# Altium PCB ShifterMatic_2Layer.PcbDoc
Units mil, origin at the board's own origin, x right, y up, seen from the top; angles counter-clockwise.
Board outline 1350 x 1300 mil, 2 copper layers (Top (L1), Bottom (L4)), stack 60.8 mil thick; 33 components, 20 nets, 92 pads, 19 vias.
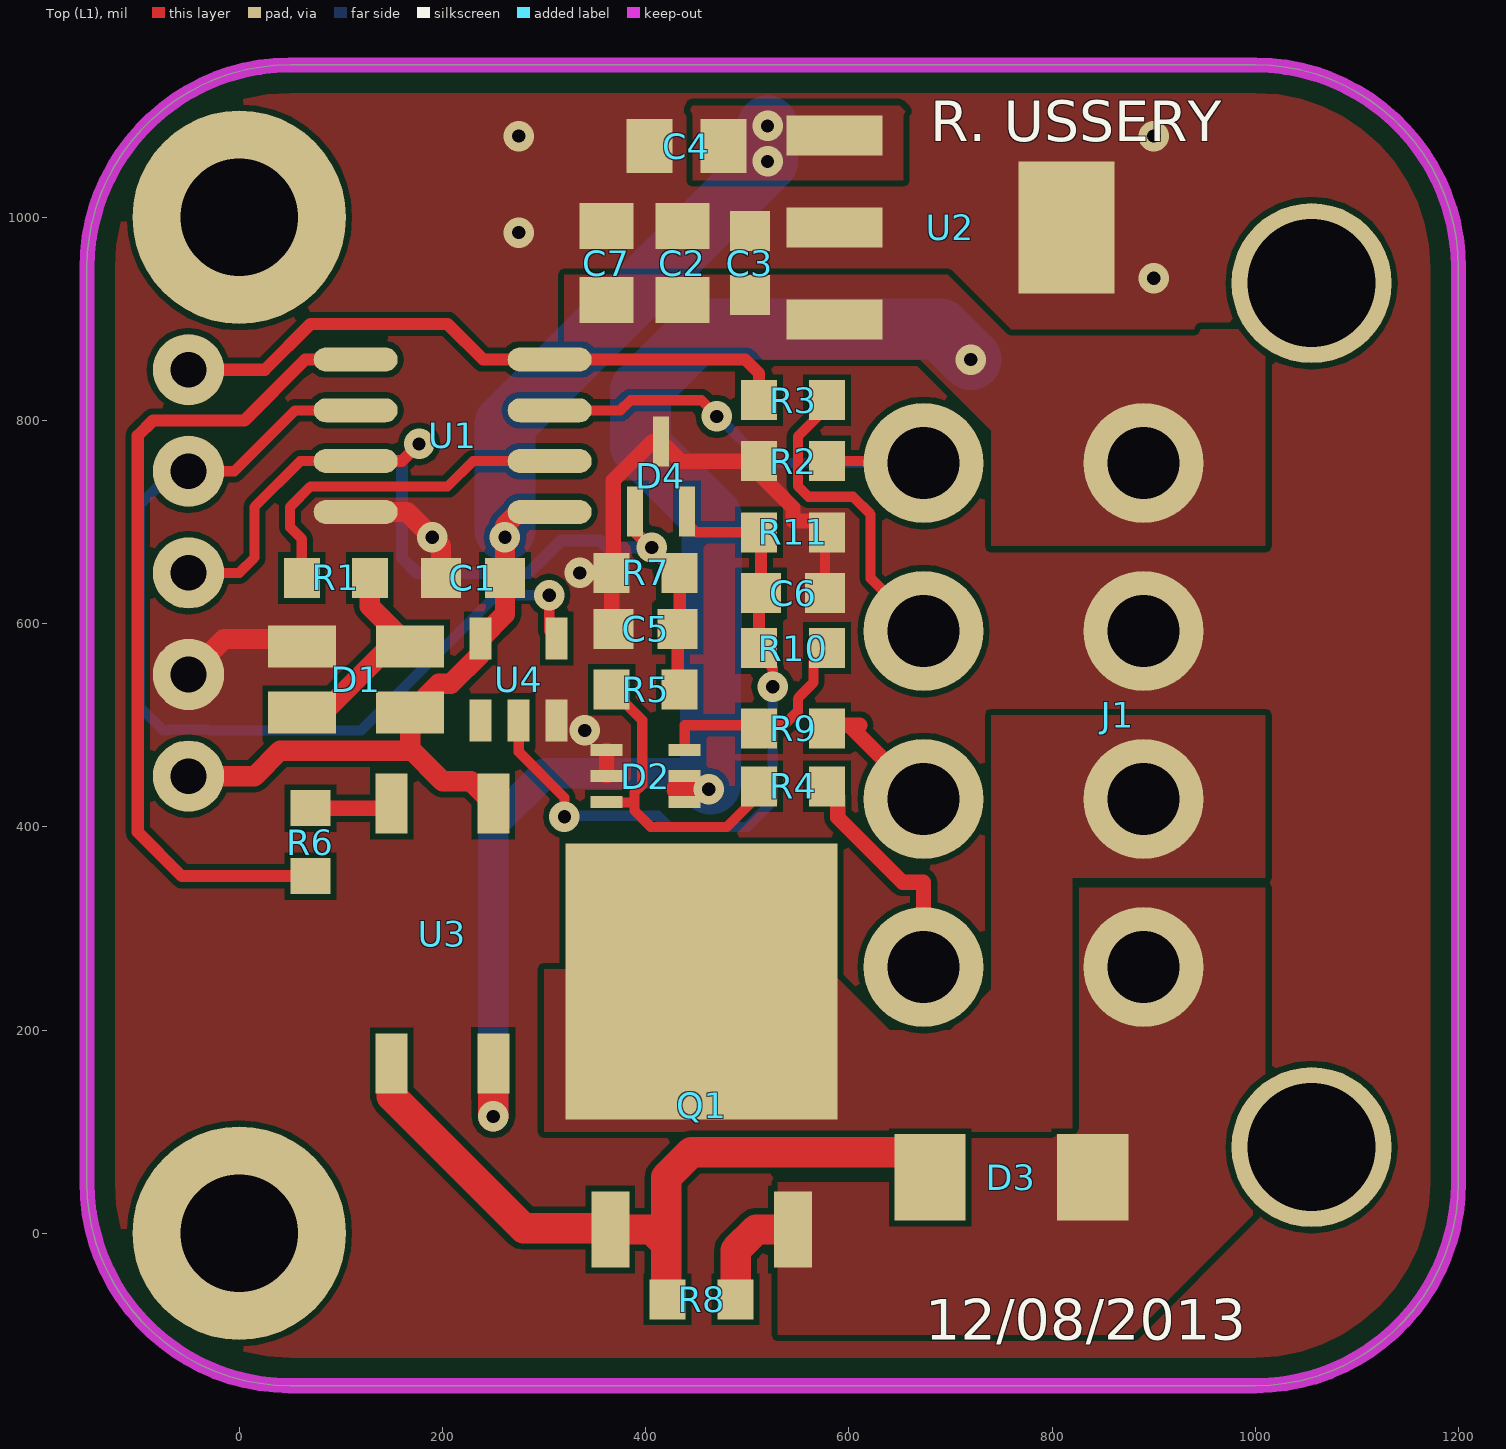
[diagram p0: Top (L1) view]
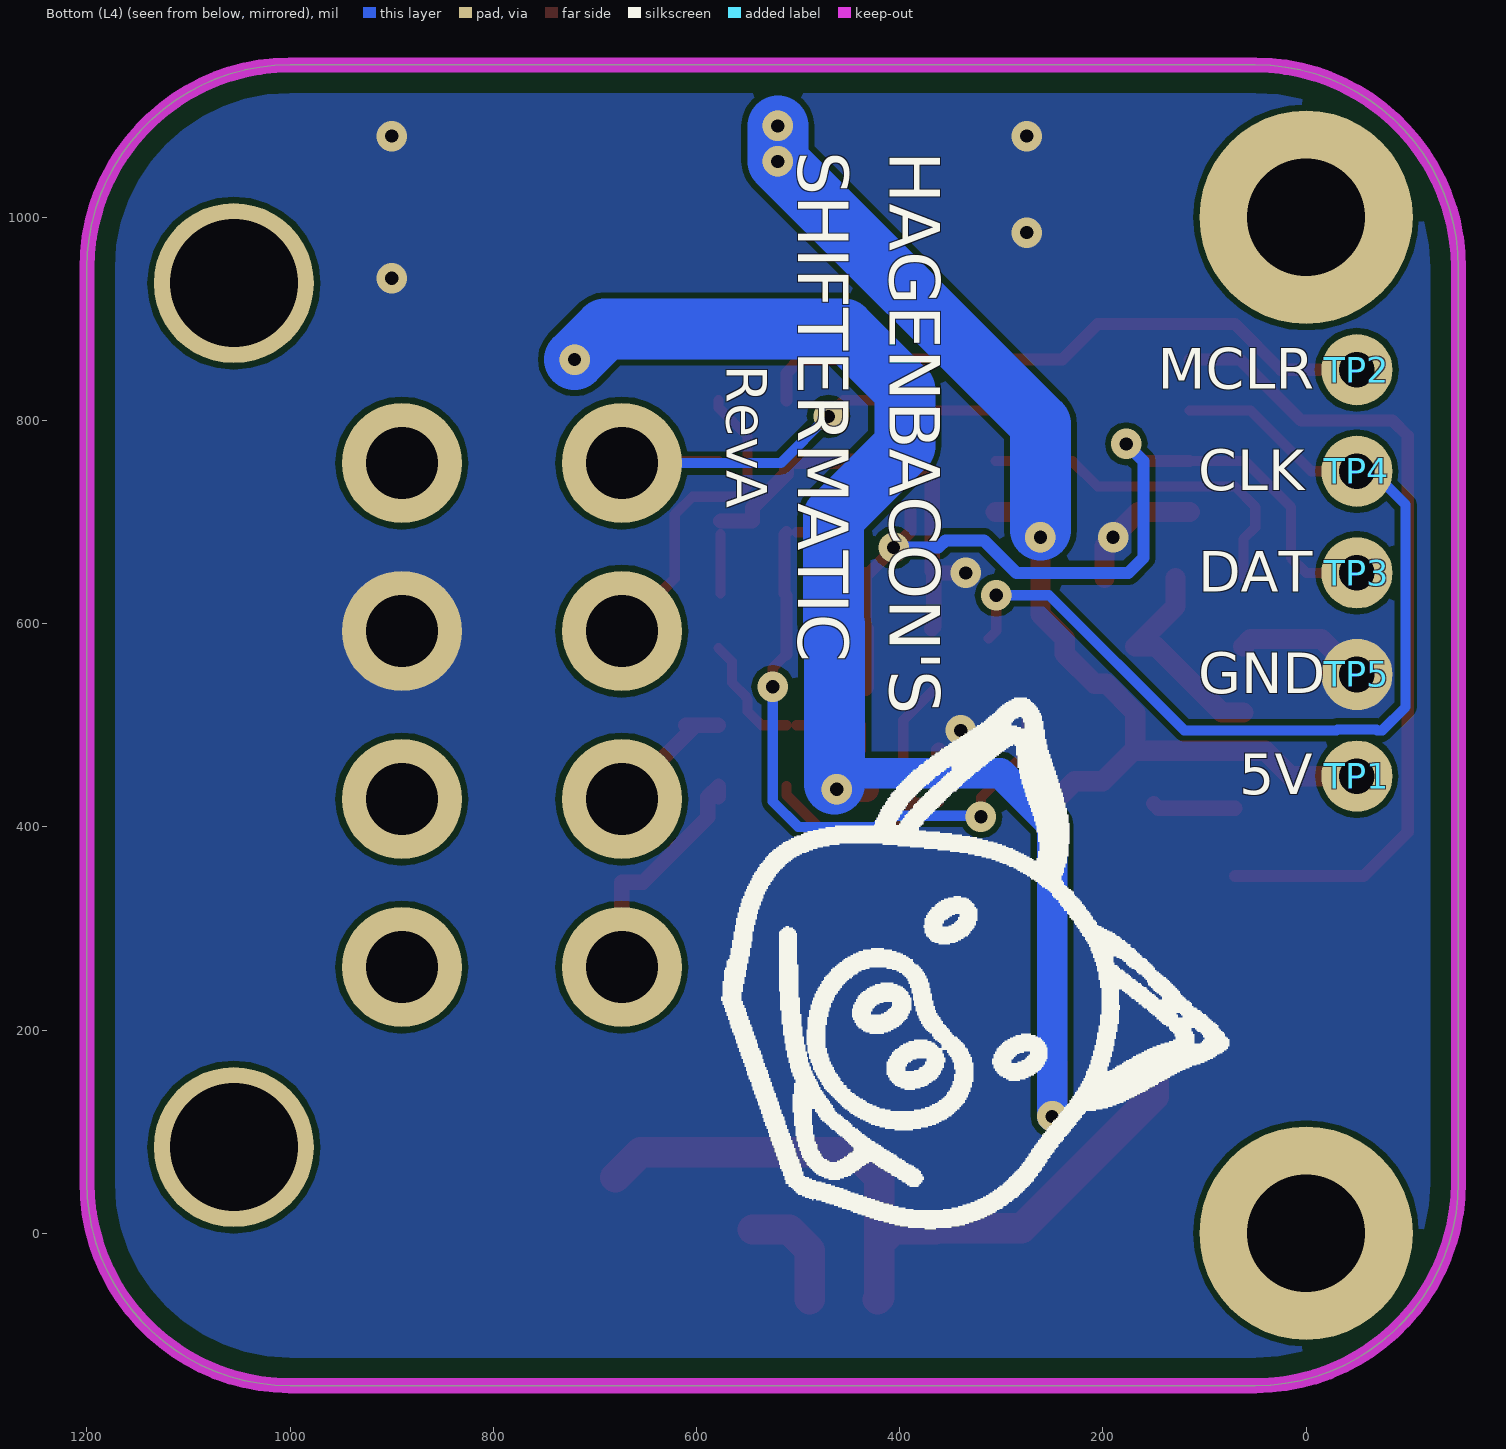
[diagram p1: Bottom (L4) view, seen from below]

## Layer stack, top to bottom
Top (L1): signal copper 1.4
Dielectric: core 58, FR-4, Dk 4.8
Bottom (L4): signal copper 1.4

## Board outline
-150,50 -150,950 cw(c50,950) 50,1150 1000,1150 cw(c1000,950) 1200,950 1200,50 cw(c1000,50) 1000,-150 50,-150 cw(c50,50)

## Design rules (kind name [scope] priority, off if disabled: settings)
AcuteAngle [All] p1: minimum=6.00000000000000E+0001 checktracksonly=FALSE
Clearance Polygon_BoardEdge [InPolygon vs OnLayer('Keep-Out Layer')] p1: gap=20
Clearance Clearance_1 [All] p2: gap=6
HoleSize [All] p1: absolutevalues=TRUE maxlimit=300 minlimit=10 maxpercent=80.000 minpercent=20.000
MinimumSolderMaskSliver [All] p1: minsoldermaskwidth=4
PasteMaskExpansion [All] p1: expansion=2
PlaneConnect PlaneConnect_Via [IsVia] p1: planeconnectstyle=Direct reliefexpansion=20 reliefentries=4 reliefconductorwidth=20 reliefairgap=10
PlaneConnect [All] p2: planeconnectstyle=Relief reliefexpansion=20 reliefentries=4 reliefconductorwidth=10 reliefairgap=10
PolygonConnect [All] p1: connectstyle=Direct reliefconductorwidth=30 reliefentries=2 polygonreliefangle="90 Angle" airgapwidth=10
RoutingVias [All] p1: holewidth=10 width=20 viastyle="Through Hole" minholewidth=10 minwidth=18 maxholewidth=28 maxwidth=50
SolderMaskExpansion [All] p1: expansion=4
SolderMaskExpansion SolderMaskExpansion_Vias [IsVia] p2: expansion=0
Width [All] p1: maxlimit=300 minlimit=10 preferedwidth=12
24 further rules are at their usual default settings.

## Components (designator, comment, footprint, x,y, rotation, side; value= is the part's Value field where it differs from the comment)
C1 "0.1µF" CAP_0603 230,645 r180 top
C2 "2.2µF" CAP_0805 436.13,955 r90 top
C3 "0.1µF" CAP_0603 502.57,955 r270 top
C4 "2.2µF" CAP_0805 440,1070 r180 top
C5 "0.1µF" CAP_0603 400,595 r0 top
C6 "0.1µF" CAP_0603 545,630 r180 top
C7 "2.2µF" CAP_0805 361.29,955 r90 top
D1 "DUAL_LED" KINGBRIGHT_DUAL_SMT_LED 115,545 r180 top
D2 "DIODE_ARRAY_BAS40BRW" SOT65P210X110-6N 400,450 r0 top
D3 "18.9V" DO-214AC_SMA_NONPOLARIZED 760,55 r180 top
D4 "5.1V" SOT65P210X110-3N 415,745 r90 top
J1 "HEADER_8" MOLEX_MINIFIT_JR_8_PIN 890,510 r270 top
Q1 "N-FET" DPAK228P970X238-3N 455,175 r90 top
R1 "300" RES_0603 95,645 r180 top
R2 "1k" RES_0603 545,760 r180 top
R3 "300" RES_0603 545,820 r180 top
R4 "300" RES_0603 545,440 r180 top
R5 "11k" RES_0603 400,535 r180 top
R6 "300" RES_0603 70,385 r90 top
R7 "4.7k" RES_0603 400,650 r0 top
R8 "1k" RES_0603 455,-65 r0 top
R9 "300" RES_0603 545,497 r180 top
R10 "11k" RES_0603 545,576 r0 top
R11 "4.7k" RES_0603 545,690 r180 top
TP1 "VCC" PAD_40MIL -50,450 r180 bottom
TP2 "MCLR" PAD_40MIL -50,850 r270 bottom
TP3 "DAT" PAD_40MIL -50,650 r270 bottom
TP4 "CLK" PAD_40MIL -50,750 r270 bottom
TP5 "GND" PAD_40MIL -50,550 r270 bottom
U1 "PIC12F675" SOIC127P600X175-8N 210,785 r180 top
U2 "LDO_NO_ENABLE" SOT230P700X180-4N 700,990 r0 top
U3 "OPTOISOLATOR_DARLINGTON" SOP254P680X220-4N 200,295 r270 top
U4 "SCHMITT_TRIGGER" SOT95P245X110-5N 275,545 r90 top

## Footprints (in the part's own frame and the unit in brackets; to place one, negate y for a bottom-side part, rotate by r counter-clockwise, add the part's x,y. Pads: shape width x height; smd on the part's side, far side on the other; paste and mask are expansions set on the pad)
CAP_0603 [mm]
  rect 1x1 smd mask+0.076: 1(-0.8,0) 2(0.8,0)
  body extent -0.8,-0.4 0.8,0.4, height 0.86
CAP_0805 [mm] "Chip Capacitor, 2-Leads, Body 2.00x0.94mm, IPC Medium Density"
  rect 1.15x1.35 smd: 1(-0.925,0) 2(0.925,0)
  body extent -1.07,-0.66 1.08,0.66, height 0.65
DO-214AC_SMA_NONPOLARIZED [mil]
  rect 70x85 smd: 1(-80,0) 2(80,0)
  body extent -90,-55 90,55, height 103
DPAK228P970X238-3N [mm]
  rect 1.9x0.95 smd: 1(-4.35,2.28) 3(-4.35,-2.28)
  rect 6.9x6.8 smd: 4(1.85,0)
  body extent -2.5,-3.35 3.7,3.35, height 2.38
KINGBRIGHT_DUAL_SMT_LED [mm] "3.0 x 2.5 x 1.4mm (LxWxH) DUAL SMT LED"
  rect 1.7x1.05 smd: 1(-1.35,-0.825) 2(1.35,-0.825) 3(-1.35,0.825) 4(1.35,0.825)
  body extent -1.5,-1.25 1.5,1.25, height 1.42
MOLEX_MINIFIT_JR_8_PIN [mm]
  round 4 hole 3.2: 0(-10.8,4.2) 0(10.8,4.2)
  round 3 hole 1.8: 1(-6.3,0) 2(-2.1,0) 3(2.1,0) 4(6.3,0) 5(-6.3,-5.5) 6(-2.1,-5.5) 7(2.1,-5.5) 8(6.3,-5.5)
  body extent -14.02,-5.98 13.97,13.92, height 11.02
PAD_40MIL [mil] "40 MIL DIAMETER PAD"
  round 70 hole 35 paste-157.48 mask+3: 1(0,0)
RES_0603 [mm] "Chip Resistor, 2-Leads, Body 1.60x0.82mm, IPC Medium Density"
  rect 0.9x1 smd: 1(-0.85,0) 2(0.85,0)
  body extent -0.85,-0.48 0.85,0.47, height 0.6
SOIC127P600X175-8N [mm] "SOIC, 8-Leads, Body 4.90x3.90mm, Pitch 1.27mm, IPC Medium Density"
  oval 2.1x0.6 smd: 1(-2.425,1.905) 2(-2.425,0.635) 3(-2.425,-0.635) 4(-2.425,-1.905) 5(2.425,-1.905) 6(2.425,-0.635) 7(2.425,0.635) 8(2.425,1.905)
  body extent -1.95,-2.45 1.95,2.45, height 1.75
SOP254P680X220-4N [mm] "SOP, 4-Leads, Body 3.85x4.40mm, Pitch 2.54mm, IPC Medium Density"
  rect 1.5x0.8 smd: 1(-3.25,1.27) 2(-3.25,-1.27) 3(3.25,-1.27) 4(3.25,1.27)
  body extent -2.3,-2.1 2.3,2.1, height 2.2
SOT65P210X110-3N [mm] "SOT23, 3-Leads, Body 2.00x2.10mm, Pitch 0.65mm, IPC Medium Density"
  rect 1.25x0.4 smd: 1(-0.875,0.65) 2(-0.875,-0.65) 3(0.875,0)
  body extent -0.7,-1.1 0.7,1.1, height 1.1
SOT65P210X110-6N [mm] "SOT23, 6-Leads, Body 2.00x2.10mm, Pitch 0.65mm, IPC Medium Density"
  rect 0.8x0.3 smd: 1(-0.975,0.65) 2(-0.975,0) 3(-0.975,-0.65) 4(0.975,-0.65) 5(0.975,0) 6(0.975,0.65)
  body extent -0.7,-1.1 0.7,1.1, height 1.1
SOT95P245X110-5N [mm]
  rect 1.05x0.55 smd: 1(-1.025,0.95) 2(-1.025,0) 3(-1.025,-0.95) 4(1.025,-0.95) 5(1.025,0.95)
  body extent -0.7,-1.5 0.7,1.5, height 1.1
SOT230P700X180-4N [mm] "SOT223, 4-Leads, Body 6.50x7.00mm (avg), Pitch 2.30mm, IPC Medium Density"
  rect 2.4x1 smd: 1(-2.9,2.3) 2(-2.9,0) 3(-2.9,-2.3)
  rect 2.4x3.3 smd: 4(2.9,0)
  body extent -1.85,-3.35 1.85,3.35, height 1.8

## Part data
C1 C2 C3 C4 C5 C6 C7: "Capacitor"
D3: library part TVS_BIDIRECTIONAL
D4: library part DUAL_ZENER_COM_ANODE
R1 R2 R3 R4 R5 R6 R7 R8 R9 R10 R11: "=Description"
TP1 TP2 TP3 TP4 TP5: library part "TestPoint SMT 40mil", "Test Point, 40-mil diameter"

## Free pads (board coordinates)
  round 210 hole 116: 0(0,1000) 1(0,0)

## Via types
v1: diameter 30, hole 13, Top (L1) to Bottom (L4), tented both sides, 19 vias

## Nets (pads, with @x,y where several pads share a name; then routed paths per layer and width w, separated by ;. In a path a pad name is that pad's centre, name@x,y a point inside that pad or via, vN(x,y) a via of type N, cw(c..) or ccw(c..) an arc to the next point about the centre after c; other vN are vias at no path point)
12V: C2.1 C3.2 C7.1 D2.4 D2.5 J1.1 U2.3 U3.4 | length 1387.5
  Top (L1) w25: 433,437 v1(462,437)
  Top (L1) w30: v1(250,115) U3.4
  Bottom (L4) w30: v1(250,115) 250,402 301,453 446,453 v1(462,437)
  Bottom (L4) w60: v1@464,442 464,599 465,600 465,705 395,775 395,830 455,890 690,890 v1(720,860)
COIL_GND: D3.1 J1.4 Q1.3 R8.2 | length 113.2
  Top (L1) w30: R8.2 488.46,-16.54 508.74,3.74 Q1.3
COIL_IN: J1.3 Q1.4
GND: C1.2 C2.2 C3.1 C4.2 C5.1 C6.1 C7.2 D1.2 D2.1 D2.2 D4.3 J1.2 R2.2 R7.1 R11.1 TP5.1 U1.8 U2.2 U2.4 U4.3 | length 783
  Top (L1) w10: C6.1 R11.1@576.5,688.03
  Top (L1) w15: v1(335,650) R7.1 ; D2.2 D2.1 ; C5.1 366.54,596.97 R7.1 ; R2.2@501.54,760 434.45,760 D4.3 406.73,779.45 368.04,740.75 368.04,651.5 R7.1 ; R2.2 511.54,747.56 545,714.09 545,701.06 R11.1@576.5,701.06
  Top (L1) w20: TP5.1 -15,585 54.33,585 D1.2 ; U1.8 165,710 198.5,676.5 C1.2
  other v1: 340,495 190,685 900,940 275,985 275,1080 900,1080
IGNIT_CUT: R6.1 U1.5 | length 823.6
  Top (L1) w12: R6.1 -56.54,351.54 -100,395 -100,785 -85,800 5,800 65,860 U1.5
M\C\L\R\: R3.2 TP2.1 U1.4 | length 626.7
  Top (L1) w12: TP2.1 25,850 70,895 205,895 240,860 U1.4 498,860 511.54,846.46 R3.2
NetC6_2: C6.2 D4.2 R10.1 R11.2 U4.2 | length 683.9
  Top (L1) w10: U4.2 275,474 320,429 v1(320,410) ; D4.2 440.59,699.41 450,690 R11.2@501.54,690 ; R10.1@511.54,570 525,556.54 v1(525,538)
  Top (L1) w12: R10.1@511.54,570 R10.1 511.54,628.03 C6.2 513.5,688.03 R11.2
  Bottom (L4) w10: v1@320,405 326,411 412,411 423,400 500,400 525,425 v1(525,538)
NetD1_1: D1.1 D1.4 R1.1 | length 217.2
  Top (L1) w20: D1.4 82.51,512.51 147.48,577.48 D1.1 128.46,617.17 R1.1
NetD2_3: D2.3 R4.2 R5.2 | length 312.8
  Top (L1) w10: D2.3 362.02,424 389,424 ; R5.2 396.54,505 396.54,441.54 389,434 389,424 ; R4.2 511.54,431.54 480,400 405,400 389,416 389,424
NetD2_6: D2.6 R9.2 R10.2 | length 205.6
  Top (L1) w10: D2.6 438.39,500 R9.2@501.54,500 ; R9.2@511.54,500 536,500 549.75,513.75 549.75,525.98 551,527.23 551,528 565,542 565,562.54 R10.2
NetD3_2: D3.2 Q1.1 R8.1 U3.3 | length 763.5
  Top (L1) w30: U3.3 150,135 280,5 363.98,5 Q1.1 406.26,3.74 420,-10 ; R8.1 420,-63.46 420,-10 ; D3.2 655,80 445,80 420,55 420,-10
NetR1_2: R1.2 U1.2 | length 348.9
  Top (L1) w10: R1.2 61.54,683.46 50,695 50,715 70,735 205,735 230,760 U1.2
NetR6_2: R6.2 U3.2 | length 81.9
  Top (L1) w15: R6.2 145.51,418.46 U3.2
SER_DIN: J1.5 R2.1 U1.3 | length 495.6
  Top (L1) w10: U1.3 375,810 385,820 455,820 470,805 v1(470,804) ; R2.1 671.5,760 J1.5
  Bottom (L4) w10: v1(470,804) 470,805 516.97,758.03 J1.5
SER_DOUT: J1.6 R3.1 | length 316.1
  Top (L1) w10: R3.1 578.46,812.96 549.75,784.24 549.75,735.51 560.25,725 604,725 621.42,707.58 621.42,644.72 J1.6
SWITCH: J1.8 R4.1 | length 239.9
  Top (L1) w15: R4.1@578.46,429.71 R4.1 589,429.46 589,409.18 652.64,345.54 673.46,345.54 J1.8
SWITCH_5V_FILTERED: C5.2 D4.1 R5.1 R7.2 TP3.1 U1.7 | length 893.8
  Top (L1) w10: TP3.1 0,650 15,665 15,715 60,760 U1.7
  Top (L1) w12: U1.7 160,760 v1(177,777) ; D4.1 389.41,690.59 430,650 R7.2 433.46,596.97 C5.2 431.5,536.97 R5.1
  Bottom (L4) w12: v1(177,777) 160,760 160,665 175,650 285,650 317,682 355,682 362,675 v1(406,675)
TACH: J1.7 R9.1 | length 135.1
  Top (L1) w15: R9.1@578.46,500 610.79,500 ; 600.79,500 J1.7
TACH_5V_FILTERED: TP4.1 U1.6 U4.4 | length 966.4
  Top (L1) w10: TP4.1 -5,750 55,810 U1.6 ; v1(305,628) 305,592.76 U4.4
  Bottom (L4) w10: TP4.1 -65,750 -98,717 -98,518 -75,495 -70.05,495 -69.05,496 -30.95,496 -29.95,495 120,495 253,628 v1(305,628) v1@305,625.8
VCC5: C1.1 C4.1 D1.3 TP1.1 U1.1 U2.1 U3.1 U4.5 | length 1152.5
  Top (L1) w20: TP1.1 15,450 40,475 168.15,475 ; U3.1 227.95,445 200,445 168.15,476.85 D1.3 196.44,540.81 208.24,540.81 237.6,570.17 U4.5 261.5,609.25 C1.1 v1(261.5,685) 261.5,696.5 275,710 U1.1
  Bottom (L4) w60: v1@261.5,692 261.5,796.5 v1(520,1055) v1(520,1090)
pads on no net: J1.0 U4.1

## Polygon pours and split planes (outlines as drawn)
GND on Bottom (L4) "BOTTOM_GND" (solid, pour order 29): -150,50 ccw(c50,50) 50,-150 1000,-150 ccw(c1000,50) 1200,50 1200,950 ccw(c1000,950) 1000,1150 50,1150 ccw(c50,950) -150,950
COIL_IN on Top (L1) "COIL_IN" (solid, pour order 22): 1010,350 1010,510 740,510 740,240 700,200 640,200 580,260 300,260 300,100 820,100 820,350
GND on Top (L1) "GND" (solid, pour order 23): 740,528.56 740,670 1010,670 1010,530
GND on Top (L1) "GND" (solid, pour order 24): 760,890 940,890 940,1110 670,1110 660,1100 660,1030 440,1030 440,1100 430,1110 250,1110 250,950 700,950
VCC5 on Top (L1) "VCC5" (solid, pour order 25): 660,1030 660,1100 650,1110 440,1110 440,1030
12V on Top (L1) "12V" (solid, pour order 26): 1010,670 740,670 740,790 670,860 320,860 320,960 690,960 760,890 1010,890
COIL_GND on Top (L1) "COIL_GND" (solid, pour order 27): 1010,340 820,340 820,160 767.5,107.5 721,107.5 720,106.5 720,20 640,20 640,50 530,50 530,-100 880,-100 1010,30
GND on Top (L1) "TOP_GND" (solid, pour order 28): -150,50 ccw(c50,50) 50,-150 1000,-150 ccw(c1000,50) 1200,50 1200,950 ccw(c1000,950) 1000,1150 50,1150 ccw(c50,950) -150,950

## Keep-outs
Keep-Out Layer:
  lines w15: -150,950 cw(c50,950) 50,1150 1000,1150 cw(c1000,950) 1200,950 ; -150,950 -150,50 ccw(c50,50) 50,-150 ; -150,950 -150,950 ; 50,-150 1000,-150 ; 50,-150 50,-150 ; 1000,-150 ccw(c1000,50) 1200,50 1200,950 ; 1000,-150 1000,-150 ; 1200,950 1200,950

## Silkscreen, mask and mechanical layers (free items; w line width, h text height)
Top Overlay:
  text "R. USSERY" at 680,1075 h40
  text "12/08/2013" at 675,-105 h40
Bottom Overlay:
  drawing of 6 lines, arcs and shapes, not listed
  text "HAGENBACON'S" at 410,1065 h50 r90
  text "SHIFTERMATIC" at 500,1065 h50 r90
  text "RevA" at 570,855.07 h40 r90
  text "MCLR" at 146,831 h40
  text "CLK" at 106.01,731.25 h40
  text "DAT" at 106.01,631.5 h40
  text "GND" at 106.01,531.75 h40
  text "5V" at 66.03,432 h40
Mechanical 15:
  lines w10: 468.15,511.85 468.15,676.1 ; 470,600 470,520 730,260 ; 620,420 620,848.27 ; 620,660 820,660 980,500 ; 750,190 730,190 730,260 ; 750,360 730,360 730,260 ; 1000,240 980,240 980,840 1000,840